# EAGLE board lipo_charger (EAGLE 8.0.0)
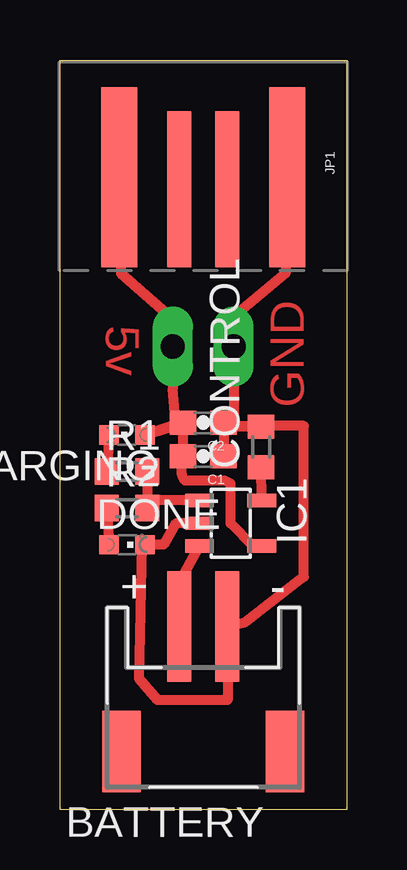
[diagram p0: board, top side]

Size 11.94 x 31.24 mm. Coordinates in mm from the lower left corner, seen from the top.
Outline: 0,31.24 11.94,31.24 11.94,0 0,0 0,31.24
Copper layers (1*16): Top 0.035mm / dielectric 1.5mm / Bottom 0.035mm
Design rules "default": minimum track width 10mil, minimum drill 24mil, track to track 8mil, track to pad 8mil, pad to pad 8mil, via to via 8mil, smd to smd 8mil, copper to edge 40mil, drill to drill 8mil, minimum pad ring 10mil, minimum via ring 8mil, stop-mask expansion 4mil, vias tented up to drill 0mil, thermal gap 10mil

## Footprints (pad centres in the part's own frame; a part is rotated, then mirrored left to right if it is on the bottom)
JST-PH-2-SMT-RA = smd 1 x 4.6: 1 1,-3.7; 2 -1,-3.7 | smd 1.6 x 3.4: NC1 -3.4,1.5; NC2 3.4,1.5
0603-CAP = smd 1.1 x 1: 1 -0.85,0; 2 0.85,0
CHIPLED_0603 = smd 0.8 x 0.8: A 0,-0.75; C 0,0.75
R0603 = smd 1 x 1.1: 1 -0.85,0; 2 0.85,0
SOT23-5L = smd 0.55 x 1.2: 1 -0.95,-1.3; 2 0,-1.3; 3 0.95,-1.3; 4 0.95,1.3; 5 -0.95,1.3
USB-A-PCB = smd 7.5 x 1.5: 5V -0.2,-3.5; GND -0.2,3.5 | smd 6.5 x 1: USB_M 0.3,-1; USB_P 0.3,1
HEADER-2 = drill 1.016 pad 1.676 long: 1 0,0; 2 0,2.54

## Placement (x,y rotation side)
BATTERY  [JST-PH-2-SMT-RA]  5.97,3.94 180 top
C1  4.7uF  [0603-CAP]  5.97,14.73 180 top
C2  4.7uF  [0603-CAP]  5.97,16.13 180 top
CHARGING  [CHIPLED_0603]  2.79,15.62 90 top
CONTROL  10k  [R0603]  8.38,15.11 90 top
DONE  [CHIPLED_0603]  2.79,11.05 270 top
IC1  MCP73831/OT  [SOT23-5L]  7.11,11.94 270 top
JP1  USBPCB  [USB-A-PCB]  5.97,26.16 270 top
R1  470  [R0603]  2.79,14.1 0 top
R2  470  [R0603]  2.79,12.57 0 top
U$1  HEADER-2  [HEADER-2]  7.24,19.3 90 top

## Library data of the parts
BATTERY CHARGING CONTROL DONE IC1 R1 R2 = adafruit
C1 C2 = SparkFun-Capacitors
JP1 = SparkFun-Connectors
U$1 = homemade-hardware

## Nets
GND: BATTERY.2 C1.1 C2.1 CONTROL.2 DONE.C IC1.2 JP1.GND U$1.1
N$1: IC1.1 R1.2 R2.2
N$2: CHARGING.C R1.1
N$3: DONE.A R2.1
N$5: BATTERY.1 IC1.3
N$6: CONTROL.1 IC1.5
VCC: C1.2 C2.2 CHARGING.A IC1.4 JP1.5V U$1.2

## Tracks (layer width: path | path; a pad name or v marks a point on that pad's centre or on a via)
GND
  Top 0.406: JP1.GND 9.4,22.35 7.11,20.45 U$1.1 7.24,16 8.38,16 | 8.38,16 10.16,16 10.16,9.71 7.69,7.8 BATTERY.2 6.98,4.57 4.06,4.57 3.3,5.46 3.43,11.05 DONE.C 4.32,11.05 4.83,11.94 IC1.2 | 8.38,16 CONTROL.2 7.41,15.96 C2.1 C1.1
N$1
  Top 0.406: R1.2 R2.2 4.09,12.89 IC1.1
N$2
  Top 0.406: CHARGING.C R1.1
N$3
  Top 0.406: R2.1 DONE.A
N$5
  Top 0.406: BATTERY.1 5.08,9.4 5.21,9.88 IC1.3
N$6
  Top 0.406: IC1.5 CONTROL.1
VCC
  Top 0.406: JP1.5V 2.54,22.35 4.57,20.57 U$1.2 4.7,17.57 4.81,16.03 CHARGING.A C2.2 C1.2 5.08,14.95 5.08,13.97 5.21,13.72 6.86,13.72 7.11,13.59 7.11,11.94 8.06,10.99 IC1.4

## Text on the board
Top: 5v | GND